# Altium PCB 800U R3N3_LED_V1.1.PcbDoc (part 2 of 2)
Units mm, origin at the board's own origin, x right, y up, seen from the top; angles counter-clockwise.
Board outline 308.48 x 220.22 mm, 4 copper layers (Top Layer, GND, Mid-Layer 2, Bottom Layer); 79 components, 48 nets, 220 pads, 97 vias.
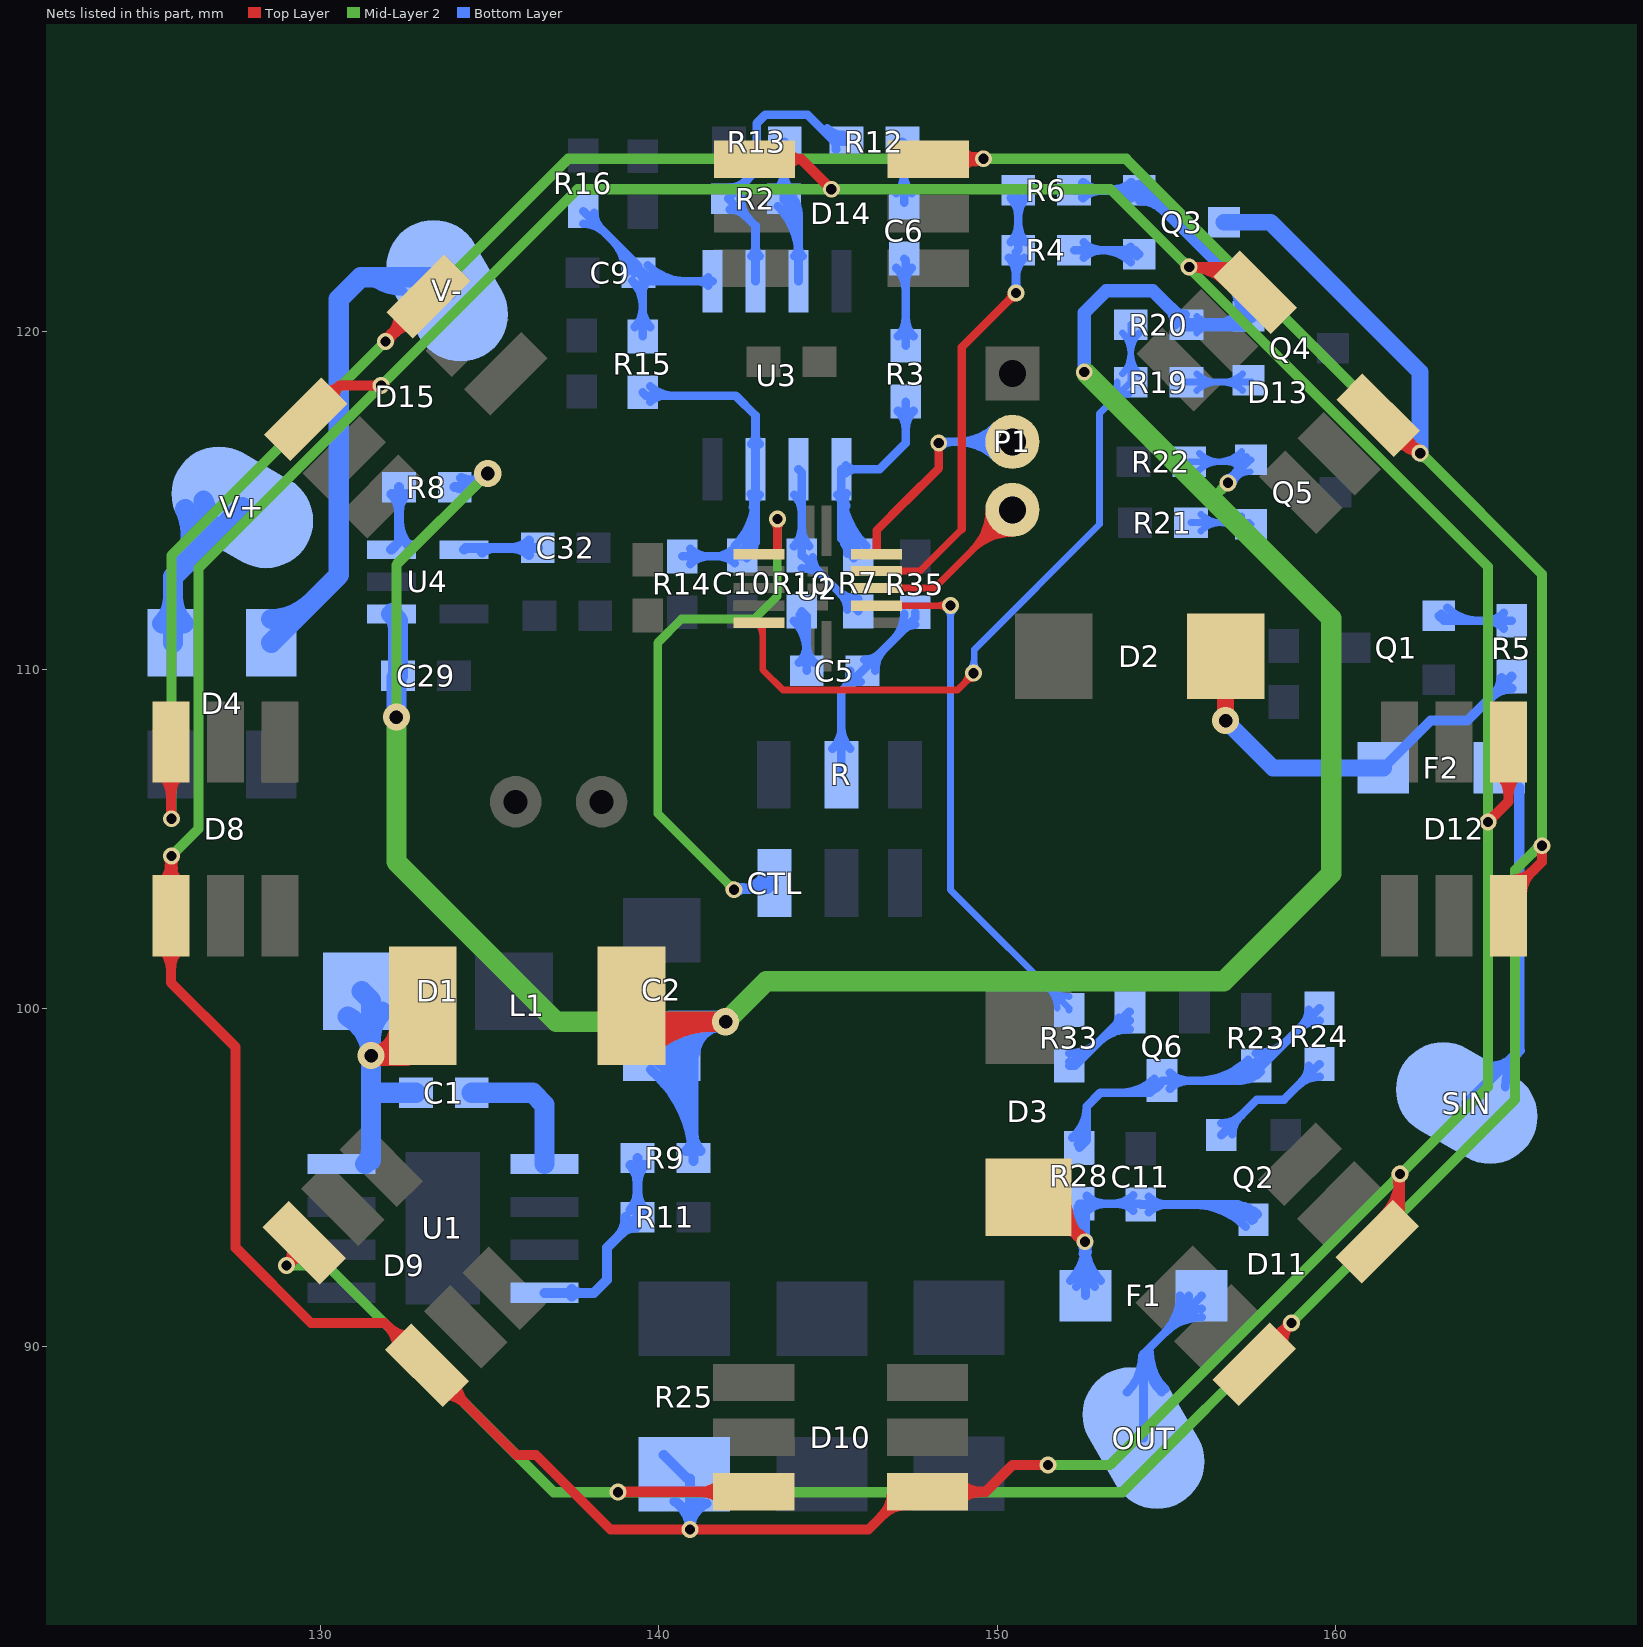
[diagram p4: the nets of this part, all layers, seen from the top]

## Via types
v1: diameter 0.5, hole 0.3, Top Layer to Bottom Layer, 88 vias
v2: diameter 0.8, hole 0.4, Top Layer to Bottom Layer, 6 vias
v3: diameter 0.6, hole 0.3, Top Layer to Bottom Layer, 3 vias

## Nets (pads, with @x,y where several pads share a name; then routed paths per layer and width w, separated by ;. In a path a pad name is that pad's centre, name@x,y a point inside that pad or via, vN(x,y) a via of type N, cw(c..) or ccw(c..) an arc to the next point about the centre after c; other vN are vias at no path point) (continued)
LED_G: R19.2 R20.2 U2.5 | length 26
  Top Layer w0.2: U2.5@142.925,111.356 cw(c142.564,110.995) 143.075,110.995 ; U2.5@142.963,111.393 143.075,111.281 143.075,110 143.675,109.4 148.825,109.4 v1@149.325,109.9 ; 149.026,109.601 ccw(c148.728,109.9) v1@149.15,109.9 ; 149.087,109.662 cw(c149.3,109.448) v1@149.3,109.75
  Bottom Layer w0.2: v1@149.194,110.006 ccw(c148.878,110.322) 149.325,110.322 ; v1@149.325,109.8 149.325,110.6 153.025,114.3 153.025,117.575 R19.2@153.95,118.5 R20.2@153.95,120.2 ; 149.325,110.202 ccw(c149.602,110.202) v1@149.406,110.006 ; 153.267,117.817 ccw(c152.584,118.5) R19.2@153.55,118.5 ; 153.388,117.938 cw(c153.9,117.426) R19.2@153.9,118.15 ; R19.2@153.703,118.747 ccw(c153.105,119.345) 153.95,119.345 ccw(c154.795,119.345) R19.2@154.197,118.747 ; R20.2@153.703,119.953 cw(c153.105,119.355) 153.95,119.355 cw(c154.795,119.355) R20.2@154.197,119.953
  other v1: 149.3,109.9
LED_R: R4.2 R6.2 U2.9 | length 18.4
  Top Layer w0.2: U2.9@146.437,112.918 147.718,112.918 148.95,114.15
  Top Layer w0.254: 148.95,114.15 148.95,119.524 v1(150.557,121.131) ; v1@150.434,121.131 cw(c150.137,121.131) 150.347,120.921 cw(c150.557,120.711) v1@150.557,121.008
  Mid-Layer 2 w0.254: v1(150.557,121.131) v1@150.557,121.182
  Bottom Layer w0.254: R4.2@150.347,122.172 cw(c149.838,121.663) 150.557,121.663 ; R4.2@150.397,122.628 ccw(c149.845,123.18) 150.625,123.18 ccw(c151.405,123.18) R4.2@150.853,122.628 ; R6.2@150.397,123.947 cw(c149.845,123.395) 150.625,123.395 cw(c151.405,123.395) R6.2@150.853,123.947 ; v1@150.47,121.218 ccw(c150.26,121.428) 150.557,121.428 ccw(c150.854,121.428) v1@150.644,121.218 ; v1(150.557,121.131) 150.557,122.332 R4.2@150.625,122.4 R6.2@150.625,124.175 ; 150.557,121.578 cw(c151.397,121.578) R4.2@150.803,122.172
LEDCTL: CTL.1 U2.1 | length 21.7
  Top Layer w0.254: U2.1@142.963,113.418 143.507,113.418 v1(143.507,114.456) ; v1@143.42,114.369 cw(c143.211,114.16) 143.507,114.16 ; 143.507,113.609 ccw(c143.751,113.609) U2.1@143.578,113.436 ; 143.507,114.157 cw(c143.805,114.157) v1@143.594,114.369
  Mid-Layer 2 w0.254: v1@142.102,103.5 ccw(c141.805,103.5) 142.015,103.71 ccw(c142.225,103.92) v1@142.225,103.623 ; v1(142.225,103.5) 139.975,105.75 139.975,110.8 140.675,111.5 142.825,111.5 143.507,112.182 v1(143.507,114.456) ; v1@143.42,114.369 cw(c143.21,114.159) 143.507,114.159 cw(c143.804,114.159) v1@143.594,114.369
  Bottom Layer w0.254: v1@142.286,103.607 ccw(c142.435,103.864) 142.512,103.577 ccw(c142.589,103.29) v1@142.332,103.438 ; v1@142.312,103.413 cw(c142.522,103.203) 142.522,103.5 cw(c142.522,103.797) v1@142.312,103.587 ; 142.757,103.5 ccw(c142.757,104.24) CTL.1@143.332,103.775 ; CTL.1@143.135,103.934 cw(c142.225,104.67) v1(142.225,103.5) 143.225,103.5 CTL.1@143.425,103.7
NetC1_1: C1.1 U1.1 | length 4
  Bottom Layer w0.6: C1.1@134.475,97.5 136.275,97.5 136.625,97.15 U1.1@136.625,95.4
NetC1_2: C1.2 D1.2 L1.1 U1.8 | length 13.4
  Top Layer w0.6: L1.1@132.147,98.6 ccw(c132.147,99.383) L1.1@132.928,99.325 ; L1.1@132.33,99.369 cw(c131.5,99.432) v2(131.5,98.6) L1.1@132.561,98.6 ; L1.1@132.498,99.537 L1.1@133.028,100.067
  Bottom Layer w0.6: D1.2@130.81,99.758 cw(c130.15,98.58) v2@131.5,98.58 ; D1.2@131.225,100.5 131.5,100.225 v2(131.5,98.6) U1.8@131.5,95.5 ; U1.8@131.325,95.4 ccw(c130.903,95.822) 131.5,95.822 ; 131.5,97.5 C1.2@132.825,97.5 ; 131.5,99.112 cw(c132.613,99.112) D1.2@131.826,99.899
NetC5_1: C5.1 R35.1 R.1 | length 10.8
  Bottom Layer w0.254: R.1@145.136,107.664 ccw(c144.5,108.3) 145.4,108.3 ccw(c146.3,108.3) R.1@145.664,107.664 ; R.1@145.4,106.9 145.4,109.35 ; 145.509,109.459 cw(c145.975,108.993) C5.1@145.975,109.652 ; C5.1@145.652,109.971 cw(c144.791,109.959) 145.4,109.35 ; C5.1@146.075,110.298 ccw(c146.075,110.957) 146.541,110.491 ; C5.1@146.398,109.975 cw(c147.298,109.975) 146.662,110.612 ; 146.935,110.885 ccw(c146.17,111.65) R35.1@147.252,111.65 ; 147.237,111.187 cw(c147.575,110.849) R35.1@147.575,111.327 ; R35.1@147.575,111.7 147.575,111.525 C5.1@146.025,109.975 145.4,109.35
NetC5_2: C5.2 R10.1 | length 4.6
  Bottom Layer w0.254: R10.1@143.997,111.447 cw(c143.083,110.533) 144.375,110.533 ; C5.2@144.147,110.203 ccw(c143.595,110.755) 144.375,110.755 ccw(c145.155,110.755) C5.2@144.603,110.203 ; R10.1@144.176,111.626 cw(c143.696,111.146) 144.375,111.146 ; R10.1@144.225,111.725 144.375,111.575 C5.2@144.375,109.975
NetC6_1: C6.1 R3.2 | length 5
  Bottom Layer w0.254: C6.1@147.022,121.872 cw(c146.35,121.2) 147.3,121.2 ; R3.2@147.072,119.853 ccw(c146.52,120.405) 147.3,120.405 ccw(c148.08,120.405) R3.2@147.528,119.853 ; C6.1@147.25,122.15 147.3,122.1 R3.2@147.3,119.575 ; 147.3,121.441 cw(c147.909,121.441) C6.1@147.478,121.872
NetC6_2: C6.2 R12.1 | length 4.3
  Bottom Layer w0.254: C6.2@147.022,124.078 ccw(c146.47,124.63) 147.25,124.63 ccw(c148.03,124.63) C6.2@147.478,124.078 ; R12.1@147.022,125.372 cw(c146.47,124.82) 147.25,124.82 cw(c148.03,124.82) R12.1@147.478,125.372 ; R12.1@147.2,125.6 147.25,125.55 C6.2@147.25,123.8
NetC9_1: C9.1 R15.2 R16.2 U3.5 | length 14.6
  Bottom Layer w0.254: R16.2@137.775,123.177 cw(c137.775,122.276) 138.412,122.913 ; R16.2@137.775,123.55 139.4,121.925 C9.1@139.4,121.725 C9.1@139.525,121.6 ; R16.2@138.098,123.5 ccw(c138.757,123.5) 138.291,123.034 ; 138.622,122.703 cw(c137.644,121.725) C9.1@139.027,121.725 ; 139.055,122.27 cw(c138.511,121.725) C9.1@139.281,121.725 ; C9.1@139.222,121.497 cw(c138.489,120.764) 139.525,120.764 ; R15.2@139.297,120.128 ccw(c138.745,120.68) 139.525,120.68 ccw(c140.305,120.68) R15.2@139.753,120.128 ; C9.1@139.499,121.774 ccw(c140.22,122.495) 140.22,121.475 ; R15.2@139.525,119.85 C9.1@139.525,121.6 ; 139.525,121.126 cw(c140.049,121.126) C9.1@139.678,121.497 ; C9.1@139.678,121.953 ccw(c140.833,123.108) 140.833,121.475 ; U3.5@141.468,121.353 ccw(c141.172,121.057) 141.172,121.475 ccw(c141.172,121.893) U3.5@141.468,121.597 ; U3.5@141.59,121.475 139.65,121.475 C9.1@139.525,121.6
NetC10_1: C10.1 R14.2 R15.1 U3.3 | length 18.8
  Bottom Layer w0.254: R15.1@139.525,118.2 139.625,118.1 142.275,118.1 142.86,117.515 U3.3@142.86,115.925 142.86,113.76 C10.1@142.475,113.375 142.45,113.35 R14.2@140.7,113.35 ; R15.1@139.753,117.922 cw(c140.184,117.491) 140.184,118.1 ; R15.1@139.753,118.378 ccw(c140.425,119.05) 140.425,118.1 ; R14.2@140.928,113.122 cw(c141.48,112.57) 141.48,113.35 cw(c141.48,114.13) R14.2@140.928,113.578 ; 141.635,113.35 ccw(c141.635,114.215) C10.1@142.247,113.603 ; 141.756,113.35 cw(c141.756,112.656) C10.1@142.247,113.147 ; C10.1@142.247,113.653 ccw(c140.766,115.134) U3.3@142.86,115.134 ; C10.1@142.426,113.474 ccw(c141.379,114.521) 142.86,114.521 ; C10.1@142.606,113.294 ccw(c141.992,113.908) 142.86,113.908 ; U3.3@142.714,115.207 cw(c142.261,114.916) 142.787,114.801 ; U3.3@142.738,115.178 cw(c142.442,114.882) 142.86,114.882 cw(c143.278,114.882) U3.3@142.982,115.178 ; U3.3@142.738,116.672 ccw(c142.442,116.968) 142.86,116.968 ccw(c143.278,116.968) U3.3@142.982,116.672 ; 142.824,114.968 cw(c143.113,114.905) U3.3@142.953,115.154
NetC11_1: C11.1 D3.2 F1.2 Q2.3 R28.2 | length 32.7
  Top Layer w0.254: D3.2@150.925,94.42 151.28,94.42 v1(152.6,93.1) ; D3.2@151.186,93.93 cw(c151.402,93.139) D3.2@151.981,93.719 ; D3.2@151.253,93.685 cw(c151.534,92.653) 152.291,93.409 ; D3.2@151.32,93.44 cw(c151.667,92.167) v1(152.6,93.1) ; D3.2@151.814,94.411 ccw(c153.043,94.395) D3.2@152.174,93.526 ; D3.2@152.068,94.407 ccw(c153.885,94.385) v1(152.6,93.1) ; v1@152.477,93.1 ccw(c152.18,93.1) 152.39,93.31 ccw(c152.6,93.52) v1@152.6,93.223 ; v1@152.481,93.068 ccw(c152.194,92.991) 152.343,93.249 ccw(c152.491,93.506) v1@152.568,93.219 ; v1@152.481,93.132 ccw(c152.194,93.209) 152.452,93.357 ccw(c152.709,93.506) v1@152.632,93.219
  Bottom Layer w0.254: F1.2@152.161,91.949 ccw(c151.077,93.033) 152.61,93.033 ccw(c154.144,93.033) F1.2@153.06,91.949 ; R28.2@152.197,93.947 cw(c151.197,92.947) v1@152.61,92.947 ; F1.2@152.341,91.769 ccw(c151.691,92.42) 152.61,92.42 ccw(c153.53,92.42) F1.2@152.88,91.769 ; R28.2@152.376,94.126 cw(c151.811,93.561) 152.61,93.561 ; 152.476,93.448 ccw(c152.86,93.55) v1@152.661,93.207 ; v1@152.493,93.039 cw(c152.155,92.843) 152.533,92.742 ; v1@152.513,93.013 cw(c152.278,92.778) 152.61,92.778 ; v1@152.513,93.187 ccw(c152.278,93.422) 152.61,93.422 ; v1@152.538,92.993 cw(c152.402,92.758) 152.665,92.828 ; F1.2@152.61,91.5 152.61,94.04 R28.2@152.425,94.225 154.225,94.225 C11.1@154.25,94.2 157.125,94.2 Q2.3@157.575,93.75 ; 152.61,92.828 cw(c152.872,92.828) v1@152.687,93.013 ; 152.61,93.372 ccw(c152.872,93.372) v1@152.687,93.187 ; R28.2@152.653,93.997 cw(c153.205,93.445) 153.205,94.225 cw(c153.205,95.005) R28.2@152.653,94.453 ; 152.674,92.795 cw(c152.985,92.878) v1@152.707,93.038 ; 153.41,94.225 ccw(c153.41,95.09) C11.1@154.022,94.478 ; 153.531,94.225 cw(c153.531,93.531) C11.1@154.022,94.022 ; C11.1@154.478,93.972 cw(c155.03,93.42) 155.03,94.2 cw(c155.03,94.98) C11.1@154.478,94.428 ; 155.769,94.2 cw(c155.769,91.969) Q2.3@157.347,93.547 ; 156.382,94.2 cw(c156.382,92.582) Q2.3@157.526,93.726 ; 156.996,94.2 cw(c156.996,93.196) Q2.3@157.706,93.906
NetC32_1: C32.1 U4.4 | length 3.7
  Bottom Layer w0.3: U4.4@134.25,113.55 134.3,113.6 C32.1@136.425,113.6 ; U4.4@134.788,113.462 cw(c135.122,113.128) 135.122,113.6 ; C32.1@136.163,113.388 ccw(c135.651,112.876) 135.651,113.6 ccw(c135.651,114.324) C32.1@136.163,113.812
NetD2_2: D2.2 F2.1 R5.1 | length 13.2
  Top Layer w0.3: D2.2@156.75,110.395 D2.2@156.755,110.4
  Top Layer w0.5: v2(156.75,108.5) D2.2@156.75,110.395
  Bottom Layer w0.3: F2.1@161.411,107.1 162.811,108.5 163.9,108.5 R5.1@165.2,109.8 ; 164.603,109.203 cw(c165.2,108.605) R5.1@165.2,109.45 ; 164.723,109.323 ccw(c164.296,109.75) R5.1@164.9,109.75
  Bottom Layer w0.5: v2(156.75,108.5) 158.15,107.1 F2.1@161.411,107.1
NetD4_2: D4.2 V-.1 | length 17.2
  Bottom Layer w0.254: 131.303,121.653 ccw(c132.458,122.808) V-.1@132.458,121.175
  Bottom Layer w0.6: D4.2@128.55,110.8 130.55,112.8 130.55,120.95 131.2,121.6 133.35,121.6 V-.1@133.75,121.2 ; D4.2@128.55,111.5 ccw(c128.55,113.19) 129.745,111.995
NetD4_3: D4.3 V+.1 | length 10.5
  Bottom Layer w0.6: D4.3@125.332,111.368 ccw(c124.564,112.136) 125.65,112.136 ccw(c126.736,112.136) D4.3@125.968,111.368 ; D4.3@125.65,110.8 125.65,112.75 ; V+.1@126.007,114.741 cw(c124.398,114.002) 125.65,112.75 ; 126.26,113.36 ccw(c125.234,114.386) V+.1@126.553,114.991 ; V+.1@127.7,114.8 125.65,112.75
NetF1_1: F1.1 OUT.1 | length 12.4
  Bottom Layer w0.254: OUT.1@153.836,88.649 ccw(c152.752,89.733) 154.286,89.733 ; OUT.1@154.325,87.3 154.325,89.785 F1.1@156.039,91.5 ; 154.41,89.733 ccw(c155.944,89.733) OUT.1@154.86,88.649 ; 154.51,89.833 ccw(c156.044,89.833) OUT.1@154.96,88.749 ; F1.1@155.404,91.5 cw(c153.871,91.5) 154.955,90.416 cw(c156.039,89.332) F1.1@156.039,90.865 ; F1.1@155.658,91.5 cw(c154.739,91.5) 155.389,90.85 cw(c156.039,90.199) F1.1@156.039,91.119
NetF2_2: F2.2 SIN.1 | length 12.7
  Bottom Layer w0.254: SIN.1@164.6,98.3 ccw(c164.6,99.19) 165.229,98.561 ; SIN.1@165.014,97.667 cw(c166.548,97.667) 165.464,98.751
  Bottom Layer w0.3: SIN.1@163.875,97.2 165.425,98.75 165.425,106.515 F2.2@164.84,107.1
NetP1_2: P1.2 U2.10 | length 10.7
  Top Layer w0.254: U2.10@146.437,113.418 146.437,114.12 147.295,114.977 147.302,114.977 148.275,115.95 v1(148.275,116.7)
  Bottom Layer w0.254: v1(148.275,116.7) 148.31,116.735 P1.2@150.45,116.735 ; v1@148.362,116.613 cw(c148.656,116.319) 148.656,116.735 ; P1.2@149.974,116.259 ccw(c148.825,115.11) 148.825,116.735 ccw(c148.825,118.36) P1.2@149.974,117.211 ; P1.2@150.154,116.439 ccw(c149.438,115.723) 149.438,116.735 ccw(c149.438,117.747) P1.2@150.154,117.031
NetP1_3: P1.3 U2.8 | length 9.5
  Top Layer w0.2: U2.8@146.437,112.418 148.143,112.418 P1.3@150.45,114.725 ; P1.3@149.75,114.725 cw(c148.06,114.725) 149.255,113.53 cw(c150.45,112.335) P1.3@150.45,114.025 ; P1.3@149.95,114.725 cw(c148.743,114.725) 149.596,113.871 cw(c150.45,113.018) P1.3@150.45,114.225
NetQ1_1: Q1.1 R5.2 | length 5
  Bottom Layer w0.254: Q1.1@163.05,111.6 163.2,111.45 R5.2@165.2,111.45 ; Q1.1@163.124,111.649 ccw(c163.604,112.129) 163.604,111.45 ; Q1.1@163.303,111.828 ccw(c164.217,112.742) 164.217,111.45 ; R5.2@164.972,111.222 ccw(c164.42,110.67) 164.42,111.45 ccw(c164.42,112.23) R5.2@164.972,111.678
NetQ2_1: Q2.1 R24.2 | length 6.2
  Bottom Layer w0.254: Q2.1@156.625,96.25 157.675,97.3 158.475,97.3 R24.2@159.525,98.35 ; Q2.1@156.625,96.598 ccw(c156.625,97.438) 157.219,96.844 ; Q2.1@156.948,96.275 cw(c157.667,96.275) 157.159,96.784 ; 158.888,97.713 cw(c159.525,97.077) R24.2@159.525,97.977 ; 159.009,97.834 ccw(c158.543,98.3) R24.2@159.202,98.3
NetQ3_1: Q3.1 R4.1 | length 4.9
  Bottom Layer w0.254: R4.1@152.275,122.4 154.075,122.4 Q3.1@154.2,122.275 ; R4.1@152.553,122.172 cw(c153.105,121.62) 153.105,122.4 cw(c153.105,123.18) R4.1@152.553,122.628 ; 153.093,122.4 cw(c153.093,121.193) Q3.1@153.947,122.047 ; 153.697,122.4 ccw(c153.697,122.753) Q3.1@153.947,122.503 ; 153.707,122.4 cw(c153.707,121.807) Q3.1@154.126,122.226
NetQ4_1: Q4.1 R19.1 | length 4.6
  Bottom Layer w0.2: R19.1@155.6,118.5 Q4.1@157.525,118.5 ; R19.1@155.897,118.253 cw(c156.495,117.655) 156.495,118.5 cw(c156.495,119.345) R19.1@155.897,118.747 ; Q4.1@157.253,118.253 ccw(c156.655,117.655) 156.655,118.5 ccw(c156.655,119.345) Q4.1@157.253,118.747
NetQ5_1: Q5.1 R21.1 | length 4.9
  Bottom Layer w0.2: R21.1@155.725,114.35 157.45,114.35 Q5.1@157.5,114.3 ; R21.1@156.022,114.103 cw(c156.62,113.505) 156.62,114.35 cw(c156.62,115.195) R21.1@156.022,114.597 ; 156.509,114.35 cw(c156.509,113.334) Q5.1@157.228,114.053 ; 156.751,114.35 ccw(c156.751,115.024) Q5.1@157.228,114.547 ; 156.992,114.35 cw(c156.992,113.817) Q5.1@157.369,114.194
NetQ6_1: Q6.1 R33.1 | length 5.8
  Bottom Layer w0.254: R33.1@152.125,98.3 152.3,98.3 153.891,99.891 Q6.1@153.922,99.891 ; R33.1@152.125,98.419 ccw(c152.125,99.129) 152.627,98.627 ; R33.1@152.125,98.673 ccw(c152.125,99.996) 153.06,99.06 ; 153.001,99.001 cw(c153.922,98.079) Q6.1@153.922,99.383 ; 153.434,99.434 cw(c153.922,98.946) Q6.1@153.922,99.637 ; Q6.1@153.507,99.507 ccw(c153.301,99.713) Q6.1@153.592,99.713
NetQ6_3: Q6.3 R23.1 R24.1 R28.1 | length 20.5
  Bottom Layer w0.254: R28.1@152.217,96.172 ccw(c151.439,97.1) 152.65,97.1 ; R28.1@152.381,95.978 ccw(c151.896,96.555) 152.65,96.555 ; R28.1@152.425,95.875 152.65,96.1 152.65,97.1 ; 153.641,97.5 ccw(c153.641,98.914) Q6.3@154.642,97.914 ; 154.255,97.5 ccw(c154.255,98.301) Q6.3@154.821,97.735 ; Q6.3@155.108,97.625 cw(c155.672,97.061) 155.672,97.859 cw(c155.672,98.656) Q6.3@155.108,98.092 ; 155.925,97.859 ccw(c155.925,99.975) R23.1@157.422,98.478 ; 156.539,97.859 ccw(c156.539,99.361) R23.1@157.601,98.299 ; 157.152,97.859 ccw(c157.152,98.748) R23.1@157.781,98.119 ; R23.1@157.65,98.419 ccw(c157.65,99.129) 158.152,98.627 ; R23.1@157.65,98.673 ccw(c157.65,99.996) 158.585,99.06 ; 158.888,99.363 cw(c159.525,98.727) R24.1@159.525,99.627 ; 159.009,99.484 ccw(c158.543,99.95) R24.1@159.202,99.95 ; R24.1@159.525,100 157.825,98.3 R23.1@157.65,98.3 157.209,97.859 Q6.3@154.875,97.859 154.516,97.5 153.05,97.5 152.65,97.1
NetR2_1: R2.1 R12.2 U3.6 | length 12.8
  Bottom Layer w0.254: R2.1@142.1,123.602 cw(c142.1,122.943) 142.566,123.409 ; R2.1@142.1,124.248 ccw(c142.1,124.907) 142.566,124.441 ; 142.687,123.288 cw(c143.323,123.925) 142.423,123.925 cw(c143.323,123.925) 142.687,124.562 ; U3.6@142.738,122.222 ccw(c142.442,122.518) 142.86,122.518 ccw(c143.278,122.518) U3.6@142.982,122.222 ; U3.6@142.86,121.475 142.86,123.115 R2.1@142.05,123.925 142.9,124.775 142.9,126.15 143.15,126.4 144.4,126.4 145.2,125.6 R12.2@145.55,125.6 ; R12.2@145.239,125.363 ccw(c144.338,125.363) 144.975,126 ccw(c145.441,126.466) R12.2@145.441,125.807
NetR2_2: R2.2 R13.1 U3.7 | length 10.9
  Bottom Layer w0.254: R13.1@143.447,125.372 cw(c142.835,124.76) 143.7,124.76 ; R2.2@143.472,124.153 ccw(c142.92,124.705) 143.7,124.705 ccw(c144.48,124.705) R2.2@143.928,124.153 ; R2.2@143.522,123.697 cw(c142.053,122.228) U3.7@144.13,122.228 ; 143.7,124.881 cw(c144.394,124.881) R13.1@143.903,125.372 ; R2.2@143.701,123.876 cw(c142.666,122.841) 144.13,122.841 ; R13.1@143.725,125.6 143.7,125.575 R2.2@143.7,123.925 144.13,123.495 U3.7@144.13,121.475 ; R2.2@143.881,124.056 cw(c143.279,123.454) 144.13,123.454 ; U3.7@144.008,122.222 ccw(c143.712,122.518) 144.13,122.518 ccw(c144.548,122.518) U3.7@144.252,122.222
NetR3_1: R3.1 R7.2 U3.1 | length 14.8
  Bottom Layer w0.254: U3.1@145.278,115.178 cw(c144.982,114.882) 145.4,114.882 cw(c145.818,114.882) U3.1@145.522,115.178 ; U3.1@145.31,115.152 cw(c145.046,114.718) 145.539,114.838 ; 145.4,114.185 ccw(c146.66,114.185) R7.2@145.769,113.294 ; 145.4,114.799 ccw(c147.274,114.799) R7.2@145.949,113.474 ; U3.1@145.4,115.412 ccw(c147.887,115.412) R7.2@146.128,113.653 ; 145.509,114.962 cw(c145.827,115.04) U3.1@145.548,115.21 ; U3.1@145.522,115.803 cw(c145.818,115.507) 145.818,115.925 cw(c145.818,116.343) U3.1@145.522,116.047 ; R7.2@145.577,113.433 ccw(c144.972,113.447) 145.4,113.875 ; R7.2@145.837,113.742 cw(c145.743,114.218) 145.4,113.875 ; R7.2@145.9,113.375 145.4,113.875 ; R3.1@147.072,117.647 cw(c146.52,117.095) 147.3,117.095 cw(c148.08,117.095) R3.1@147.528,117.647 ; R3.1@147.3,117.925 147.3,116.7 146.525,115.925 U3.1@145.4,115.925 145.4,113.875
NetR7_1: R7.1 R10.2 U3.2 | length 9.2
  Bottom Layer w0.254: R10.2@143.997,113.653 ccw(c143.445,114.205) 144.225,114.205 ccw(c145.005,114.205) R10.2@144.453,113.653 ; U3.2@144.008,115.178 cw(c143.483,114.653) 144.225,114.653 ; U3.2@144.13,115.925 144.225,115.83 R10.2@144.225,113.375 144.25,113.375 R7.1@145.9,111.725 ; R10.2@144.225,113.002 cw(c144.225,112.041) 144.904,112.721 ; R10.2@144.548,113.325 ccw(c145.147,113.325) 144.723,112.902 ; 145.263,112.362 ccw(c145.9,112.998) R7.1@145.9,112.098 ; 145.384,112.241 cw(c144.918,111.775) R7.1@145.577,111.775
NetR8_2: R8.2 U4.3 | length 3.9
  Bottom Layer w0.3: U4.3@132.1,113.55 132.325,113.775 R8.2@132.325,115.4 ; R8.2@132.113,115.188 cw(c131.601,114.676) 132.325,114.676 cw(c133.049,114.676) R8.2@132.537,115.188 ; 132.325,114.395 ccw(c133.395,114.395) U4.3@132.638,113.638
NetR9_1: R9.1 R11.2 U1.4 | length 10
  Bottom Layer w0.3: U1.4@136.625,91.59 138.09,91.59 138.475,91.975 138.475,92.925 R11.2@139.375,93.825 R9.1@139.375,95.575 ; U1.4@137.431,91.484 cw(c137.687,91.228) 137.687,91.59 cw(c137.687,91.952) U1.4@137.431,91.696 ; 138.778,93.228 ccw(c138.18,93.825) R11.2@139.025,93.825 ; 138.898,93.348 cw(c139.325,92.921) R11.2@139.325,93.525 ; R11.2@139.163,94.037 ccw(c138.651,94.549) 139.375,94.549 ccw(c140.099,94.549) R11.2@139.587,94.037 ; R9.1@139.163,95.363 cw(c138.651,94.851) 139.375,94.851 cw(c140.099,94.851) R9.1@139.587,95.363
OUTPUT: R33.2 U2.7 | length 18.1
  Top Layer w0.2: U2.7@146.437,111.893 v1@148.625,111.893 ; 148.247,111.893 ccw(c148.247,112.278) v1@148.519,112.006 ; 148.279,111.893 cw(c148.279,111.554) v1@148.519,111.794
  Bottom Layer w0.2: v1@148.519,111.794 cw(c148.263,111.538) 148.625,111.538 cw(c148.987,111.538) v1@148.731,111.794 ; v1(148.625,111.9) 148.625,103.5 152.125,100 R33.2@152.125,99.95 ; R33.2@151.775,100 ccw(c150.93,100) 151.528,100.597 ccw(c152.125,101.195) R33.2@152.125,100.35
R-: D8.1 D9.1 D10.1 D11.1 D12.1 D13.1 D14.1 D15.1 R25.2 | length 165.7
  Top Layer w0.3: D8.1@125.304,101.802 cw(c124.621,101.119) 125.587,101.119 cw(c126.553,101.119) D8.1@125.87,101.802 ; D8.1@125.304,103.667 ccw(c124.621,104.35) 125.587,104.35 ccw(c126.553,104.35) D8.1@125.87,103.667 ; v1@125.513,104.45 cw(c125.227,104.284) 125.546,104.199 ; 125.587,104.227 cw(c125.873,104.227) v1@125.671,104.429 ; v1(125.6,104.5) 125.587,104.487 D8.1@125.587,102.735 125.587,100.763 127.5,98.85 127.5,92.925 129.725,90.7 131.9,90.7 D9.1@133.155,89.445 135.8,86.8 136.375,86.8 138.575,84.6 146.2,84.6 D10.1@147.4,85.8 ; 125.645,104.134 cw(c126.047,104.242) v1@125.687,104.45 ; D15.1@129.57,117.401 130.569,118.4 ; D15.1@130.102,118.255 ccw(c130.197,118.772) 130.569,118.4 ; D15.1@130.424,117.933 cw(c130.941,118.028) 130.569,118.4 ; v1(131.8,118.4) 130.569,118.4 ; D9.1@132.295,89.905 ccw(c131.329,89.905) 132.012,90.588 ccw(c132.695,91.271) D9.1@132.695,90.305 ; D9.1@133.614,88.586 cw(c133.614,87.62) 134.297,88.303 cw(c134.98,88.986) D9.1@134.014,88.986 ; D14.1@142.835,125.088 144.212,125.088 ; D14.1@143.822,124.874 cw(c144.212,124.626) 144.212,125.088 ; D14.1@143.822,125.302 ccw(c144.212,125.549) 144.212,125.088 ; v1(145.1,124.2) 144.212,125.088 ; 146.592,84.992 ccw(c145.872,85.712) D10.1@146.89,85.712 ; 146.645,85.045 cw(c147.29,84.399) D10.1@147.29,85.312 ; D10.1@147.94,85.712 149.662,85.712 150.45,86.5 v1(151.5,86.5) ; D10.1@148.873,85.429 cw(c149.556,84.746) 149.556,85.712 cw(c149.556,86.678) D10.1@148.873,85.995 ; 156.328,121.9 cw(c156.328,120.894) D13.1@157.091,121.549 ; D13.1@156.863,121.354 ccw(c155.675,120.335) v1(155.675,121.9) 156.75,121.9 157.495,121.155 D13.1@157.626,121.155 ; D11.1@161.23,93.105 161.9,93.775 v1(161.9,95.1) ; D11.1@161.406,93.847 ccw(c160.214,95.039) v1@161.9,95.039 ; D11.1@161.618,93.635 ccw(c160.939,94.315) 161.9,94.315 ; v1@161.813,95.05 cw(c161.558,94.902) 161.843,94.826 ; v1(164.5,105.5) 165.113,106.113 D12.1@165.113,107.865 ; D12.1@164.83,106.933 cw(c164.147,106.25) 165.113,106.25 cw(c166.079,106.25) D12.1@165.396,106.933
  Mid-Layer 2 w0.3: v1(125.6,104.5) 126.4,105.3 126.4,113 v1(131.8,118.4) 137.6,124.2 v1(145.1,124.2) 153.35,124.2 164.5,113.05 v1(164.5,105.5) 164.5,97.675 153.325,86.5 v1(151.5,86.5) ; 155.462,122.088 ccw(c155.675,122.302) v1@155.675,122 ; v1@155.775,121.9 ccw(c156.077,121.9) 155.863,121.687 ; 161.712,94.887 ccw(c161.498,95.1) v1@161.8,95.1 ; v1@161.9,95.2 ccw(c161.9,95.502) 162.113,95.288
  Bottom Layer w0.3: R25.2@140.15,86.8 R25.2@140.85,86.1 ; R25.2@140.476,85.432 cw(c139.926,84.598) 140.925,84.598 cw(c141.778,84.598) R25.2@141.41,85.368 ; v1(140.925,84.6) R25.2@140.925,86.1 ; 140.925,85.074 cw(c141.55,85.074) R25.2@141.281,85.639
RED: D8.6 D9.6 D10.6 D11.6 D12.6 D13.6 D14.6 D15.6 Q3.3 | length 160.6
  Top Layer w0.3: D8.6@125.304,106.933 cw(c124.621,106.25) 125.587,106.25 cw(c126.553,106.25) D8.6@125.87,106.933 ; 125.587,105.873 ccw(c125.873,105.873) v1@125.671,105.671 ; D8.6@125.587,107.865 125.587,105.613 v1(125.6,105.6) ; v1@129.095,92.495 cw(c129.527,92.063) D9.6@129.527,92.674 ; v1@129.097,92.374 cw(c129.444,92.281) D9.6@129.264,92.592 ; D9.6@129.143,92.961 cw(c128.6,92.801) v1(129,92.4) 129.527,92.927 D9.6@129.527,93.074 ; v1@131.899,119.797 ccw(c131.807,120.14) 132.115,119.962 ; v1(131.925,119.7) 133.199,120.974 D15.6@133.199,121.03 ; v1@132.016,119.791 ccw(c131.238,120.57) D15.6@132.339,120.57 ; v1@132.022,119.674 cw(c132.528,119.538) 132.266,119.993 ; v1@132.024,119.69 cw(c132.363,119.656) 132.193,119.951 ; 132.152,119.927 cw(c132.739,119.339) D15.6@132.739,120.17 ; v1(138.8,85.7) 138.812,85.712 D10.6@142.81,85.712 ; v1@138.871,85.629 cw(c139.071,85.429) 139.071,85.712 ; D10.6@141.877,85.429 ccw(c141.194,84.746) 141.194,85.712 ccw(c141.194,86.678) D10.6@141.877,85.995 ; D14.6@147.965,125.088 149.588,125.088 v1(149.6,125.1) ; D14.6@148.898,124.805 cw(c149.581,124.122) 149.581,125.088 cw(c149.581,126.054) D14.6@148.898,125.371 ; 149.324,125.157 ccw(c149.401,125.445) v1@149.55,125.187 ; 149.329,125.088 ccw(c149.329,125.371) v1@149.529,125.171 ; 149.353,125.027 ccw(c149.284,125.282) v1@149.513,125.15 ; D11.6@157.601,89.477 157.601,89.601 v1(158.7,90.7) ccw(c159.302,90.098) D11.6@158.458,89.988 ; D11.6@158.061,90.336 ccw(c158.061,91) v1@158.531,90.531 ; 158.392,90.451 ccw(c158.166,90.843) v1@158.603,90.726 ; D13.6@161.255,117.526 v1@162.381,116.4 ; D13.6@161.721,116.667 cw(c161.736,115.755) v1@162.381,116.4 ; D13.6@162.114,117.06 ccw(c163.026,117.045) v1@162.381,116.4 ; 162.126,116.655 ccw(c162.5,117.029) v1@162.5,116.5 ; 162.137,116.541 ccw(c162.359,116.926) v1@162.474,116.497 ; D13.6@162.166,116.773 ccw(c162.679,117.07) v1@162.526,116.497 ; v1(162.5,116.4) v1@162.381,116.4 ; D12.6@165.113,102.735 165.113,103.338 166.1,104.325 v1(166.1,104.8) ; D12.6@165.113,103.785 ccw(c165.113,104.863) 165.875,104.1 ; D12.6@165.513,103.385 cw(c166.366,103.385) 165.763,103.988
  Mid-Layer 2 w0.3: v1(125.6,105.6) 125.6,113.375 v1(131.925,119.7) 137.325,125.1 v1(149.6,125.1) 153.825,125.1 153.825,125.075 v1(162.5,116.4) ; v1(129,92.4) 130.2,92.4 136.9,85.7 v1(138.8,85.7) 153.7,85.7 v1(158.7,90.7) 165.3,97.3 165.3,104.075 166.025,104.8 v1(166.1,104.8) 166.1,112.825 v1@162.512,116.413 ; v1@162.5,116.3 cw(c162.5,115.998) 162.713,116.212 ; 165.801,104.576 cw(c166.1,104.278) v1@166.1,104.7
  Bottom Layer w0.5: Q3.3@156.7,123.225 158.075,123.225 162.5,118.8 v1(162.5,116.4)
VDD_+5V: C2.1 C29.1 L1.2 Q3.2 Q4.2 Q5.2 R6.1 R8.1 R9.2 R20.1 R22.1 U4.1 | length 130.9
  Top Layer w0.2: v1(156.825,115.525) v1@156.825,115.6
  Top Layer w0.6: L1.2@139.196,100.067 139.663,99.6 v2(141.975,99.6) ; L1.2@139.691,98.822 cw(c141.569,96.944) 141.569,99.6 ; L1.2@139.691,99.812 ccw(c140.203,100.324) 140.203,99.6
  Mid-Layer 2 w0.3: v2(132.25,108.6) 132.25,113.1 v2(134.95,115.8) ; 156.363,115.037 156.363,115.063 v1(156.825,115.525)
  Mid-Layer 2 w0.6: v2(132.25,108.6) 132.25,104.325 136.975,99.6 v2(141.975,99.6) 143.175,100.8 156.7,100.8 159.875,103.975 159.875,111.525 156.363,115.037 v1@152.65,118.75
  Bottom Layer w0.2: R22.1@155.675,116.15 Q5.2@157.45,116.15 ; R20.1@155.897,119.953 cw(c156.495,119.355) 156.495,120.2 cw(c156.495,121.045) R20.1@155.897,120.447 ; R22.1@155.972,115.903 cw(c156.57,115.305) 156.57,116.15 cw(c156.57,116.995) R22.1@155.972,116.397 ; 156.172,120.2 ccw(c156.172,121.728) Q4.2@157.253,120.647 ; 156.509,116.15 ccw(c156.509,117.166) Q5.2@157.228,116.447 ; 156.655,120.2 ccw(c156.655,121.245) Q4.2@157.394,120.506 ; 156.751,116.15 cw(c156.751,115.476) Q5.2@157.228,115.953 ; v1@156.786,115.67 ccw(c156.681,116.062) Q5.2@157.032,115.859 ; v1(156.825,115.525) Q5.2@157.45,116.15 ; v1@156.825,115.675 ccw(c156.825,116.037) 157.081,115.781 ccw(c157.337,115.525) v1@156.975,115.525 ; v1@156.86,115.56 ccw(c156.22,116.2) Q5.2@157.125,116.2 ; v1@156.864,115.67 ccw(c156.927,115.905) 157.048,115.694 ; v1@156.92,115.62 cw(c157.475,115.065) Q5.2@157.475,115.85 ; v1@156.97,115.486 cw(c157.435,115.362) Q5.2@157.194,115.778 ; v1@156.97,115.564 cw(c157.278,115.646) 157.002,115.806 ; 156.992,116.15 ccw(c156.992,116.683) Q5.2@157.369,116.306 ; Q4.2@157.325,120.2 Q4.2@157.525,120.4 ; Q5.2@157.5,116.2 Q5.2@157.45,116.15
  Bottom Layer w0.3: R8.1@133.975,115.4 134.55,115.4 ; R8.1@134.025,115.4 ccw(c134.267,115.891) 134.654,115.504 ; R8.1@134.158,115.669 ccw(c134.462,116.288) v2(134.95,115.8) 134.55,115.4 ; R8.1@134.283,115.248 cw(c134.55,115.091) 134.55,115.4 ; R8.1@134.283,115.552 ccw(c134.55,115.709) 134.55,115.4 ; R8.1@134.354,115.331 ccw(c133.997,115.95) v2@134.703,115.839 ; C2.1@139.768,98.187 cw(c137.504,95.491) R9.2@141.025,95.491 ; C2.1@139.961,98.417 cw(c138.045,96.135) 141.025,96.135 ; C2.1@140.154,98.647 cw(c138.585,96.779) 141.025,96.779 ; C2.1@140.347,98.877 cw(c139.126,97.422) 141.025,97.422 ; C2.1@140.54,99.106 cw(c139.666,98.066) C2.1@141.025,98.066 ; R9.2@140.813,95.787 ccw(c140.301,96.299) 141.025,96.299 ccw(c141.749,96.299) R9.2@141.237,95.787 ; R9.2@141.025,95.575 C2.1@141.025,98.921 ; R6.1@152.275,124.175 Q3.2@154.2,124.175 154.319,124.175 157.525,120.969 ; R6.1@152.537,123.963 cw(c153.049,123.451) 153.049,124.175 cw(c153.049,124.899) R6.1@152.537,124.387 ; Q3.2@153.963,123.963 ccw(c153.451,123.451) 153.451,124.175 ccw(c153.451,124.899) Q3.2@153.963,124.387 ; Q3.2@154.225,123.875 cw(c154.225,122.923) 154.898,123.596 ; Q3.2@154.525,124.175 ccw(c155.022,124.175) Q3.2@154.671,123.824 ; 155.003,120.797 cw(c154.405,120.2) R20.1@155.25,120.2 ; 155.123,120.677 ccw(c155.55,121.104) R20.1@155.55,120.5 ; 156.568,121.927 cw(c155.041,120.4) Q4.2@157.2,120.4 ; 157.08,121.414 cw(c156.065,120.4) Q4.2@157.5,120.4 ; Q4.2@157.355,120.647 ccw(c157.135,120.969) 157.525,120.969 ; Q4.2@157.525,120.4 157.525,120.969 ; 157.592,120.902 cw(c157.09,120.4) Q4.2@157.8,120.4 ; Q4.2@157.695,120.647 cw(c157.915,120.969) 157.525,120.969
  Bottom Layer w0.4: v1(152.575,118.8) 152.575,120.55 153.225,121.2 154.6,121.2 R20.1@155.6,120.2 Q4.2@157.325,120.2
  Bottom Layer w0.6: U4.1@132.1,111.65 132.3,111.45 C29.1@132.3,109.825 132.25,109.775 v2(132.25,108.6) ; U4.1@132.118,111.668 cw(c131.678,111.228) 132.3,111.228 ; C2.1@140.319,99.627 v2@141.948,99.627 ; C2.1@140.337,98.796 cw(c141.272,98.685) 141.272,99.627 ; C2.1@140.932,98.725 cw(c141.948,98.604) v2@141.948,99.627 ; v2(141.975,99.6) v2@141.948,99.627
pads on no net: U1.5
copper on no net:
  other v3: 145.35,105.3

## Polygon pours and split planes (outlines as drawn)
GND on GND "G" (solid, remove dead copper, pour order 14): 121.3,128.9 168.775,128.9 168.775,82.775 168.7,82.7 121.075,82.7 121.075,128.825 121.15,128.9
AGND on GND "G" (solid, remove dead copper, pour order 10): 136.15,126 136.15,120.325 136.125,120.3 136.325,120.1 139.175,120.1 139.475,119.8 139.675,119.6 139.675,118.2 139.675,106.65 139.625,106.6 139.725,106.5 149.025,106.5 149.025,127.725 149.1,127.8 137.95,127.8 136.15,126
GND on Top Layer "B" (solid, remove dead copper, pour order 13): 121.3,128.9 168.775,128.9 168.775,82.775 168.7,82.7 121.075,82.7 121.075,128.825 121.15,128.9
AGND on Top Layer "T" (solid, remove dead copper, pour order 9): 136.15,126 136.15,120.325 136.125,120.3 136.325,120.1 139.175,120.1 139.475,119.8 139.675,119.6 139.675,118.2 139.675,106.65 139.625,106.6 139.725,106.5 149.025,106.5 149.025,127.725 149.1,127.8 137.95,127.8 136.15,126
AGND on Mid-Layer 2 "B" (solid, remove dead copper, pour order 8): 136.15,126 136.15,120.325 136.125,120.3 136.325,120.1 139.175,120.1 139.475,119.8 139.675,119.6 139.675,118.2 139.675,106.65 139.625,106.6 139.725,106.5 149.025,106.5 149.025,127.725 149.1,127.8 137.95,127.8 136.15,126
GND on Mid-Layer 2 "M" (solid, remove dead copper, pour order 12): 121.3,128.9 168.775,128.9 168.775,82.775 168.7,82.7 121.075,82.7 121.075,128.825 121.15,128.9
GND on Bottom Layer "B" (solid, remove dead copper, pour order 11): 121.3,128.9 168.775,128.9 168.775,82.775 168.7,82.7 121.075,82.7 121.075,128.825 121.15,128.9

## Keep-outs
Keep-Out Layer:
  circle w0.15: c153.8,105.3 r3
  circle w0.15: c145.4,96.7 r3
  lines w0.2: 122.647,103.829 ccw(c145.399,105.308) 122.85,101.934 ccw(c123.344,102.008) 123.344,101.508 123.932,101.508 ccw(c145.399,105.308) 124.499,99.108 124.129,99.108 ccw(c124.129,98.608) 123.652,98.458 ccw(c145.399,105.308) 143.919,82.556 cw(c145.399,82.308) 146.878,82.556 ccw(c145.399,105.308) 167.145,98.458 ccw(c166.668,98.608) 166.668,99.108 166.298,99.108 ccw(c145.399,105.308) 166.865,101.508 167.453,101.508 ccw(c167.453,102.008) 167.948,101.934 ccw(c145.399,105.308) 168.151,103.829 cw(c168.399,105.308) 168.151,106.787 ccw(c145.399,105.308) 146.878,128.06 cw(c145.399,128.308) 143.919,128.06 ccw(c145.399,105.308) 122.647,106.787 cw(c122.399,105.308) 122.647,103.829

## Other copper
Top Layer:
  pour cut-out: 140.6,123.375 141.625,123.375 141.65,123.4 141.65,122.6 140.7,122.6
  pour cut-out: 142.825,105.9 147.9,105.9 147.9,104.7 142.825,104.7
GND:
  pour cut-out: 142.825,105.9 147.9,105.9 147.9,104.7 142.825,104.7
Mid-Layer 2:
  pour cut-out: 134.525,87.7 134.525,89.025 136.975,89.025 137.025,89.075 137.025,87.725
  pour cut-out: 139.475,127.9 140.8,127.9 140.8,125.45 140.85,125.4 139.5,125.4
  pour cut-out: 152.95,120.9 156.5,120.9 156.5,119.025 156.525,119 153.025,119 152.925,119.1
  pour cut-out: 158.875,105.5 162.425,105.5 162.425,103.625 162.45,103.6 158.95,103.6 158.85,103.7
  pour cut-out: 161.8,93.6 165.35,93.6 165.35,91.725 165.375,91.7 161.875,91.7 161.775,91.8
  pour cut-out: 142.825,105.9 147.9,105.9 147.9,104.7 142.825,104.7
Bottom Layer:
  pour cut-out: 130.9,102.8 132.575,102.8 132.675,102.7 132.675,101.525 132.65,101.5 130.95,101.5 130.85,101.6
  pour cut-out: 144.15,105.1 146.5,105.1 146.5,102.425 146.475,102.4 144.225,102.4
  pour cut-out: 149.125,106.7 150.8,106.7 150.9,106.6 150.9,105.425 150.875,105.4 149.175,105.4 149.075,105.5
  pour cut-out: 131.3,124 132.975,124 133.075,123.9 133.075,122.725 133.05,122.7 131.35,122.7 131.25,122.8
  pour cut-out: 142.825,105.9 147.9,105.9 147.9,104.7 142.825,104.7
  pour cut-out: 135.325,95.3 138.725,95.3 138.725,92.2 135.325,92.2
  pour cut-out: 128.875,93.7 131.925,93.7 131.925,92.2 128.875,92.2

## Silkscreen, mask and mechanical layers (free items; w line width, h text height)
Top Overlay:
  text "20160819" at 136.25,94.7 h1.5
  text "800U" at 137.05,93.3 h1.5
  text "R3N3_SENSOR" at 137.05,91.9 h1.5
  text "_V1.1" at 137.5,90.2 h1.5
Bottom Overlay:
  lines w0.2: 136.475,125.5 136.475,125.65 137.225,126.4 138.825,126.4 ; 138.9,126.4 138.825,126.4 ; 139.4,126 139,126.4 138.95,126.4 138.825,126.4 ; 143.331,114.279 143.331,110.806 148.731,110.806 148.731,114.456 143.507,114.456 ; 148.775,112.4 149.3,112.4 ; 154.05,113.5 154.05,108.2 157.3,108.2 157.3,113.5 156.725,113.5 ; 156.725,113.5 156.725,121.3 153,121.3 153,113.5 156.725,113.5 ; 149.35,109.925 153.525,109.925 153.525,113.1 149.35,113.1 149.35,109.925
Mechanical 1:
  circle w0.2: c145.399,83.808 r0.001
  circle w0.2: c145.399,126.808 r0.001
  circle w0.15: c153.8,105.3 r3
  circle w0.15: c145.4,96.7 r3
  lines w0.005: -0.127,0.508 -0.127,210.508 296.873,210.508 296.873,0.508 -0.127,0.508
  lines w0.2: 122.647,103.829 ccw(c145.399,105.308) 122.85,101.934 ccw(c123.344,102.008) 123.344,101.508 123.932,101.508 ccw(c145.399,105.308) 124.499,99.108 124.129,99.108 ccw(c124.129,98.608) 123.652,98.458 ccw(c145.399,105.308) 143.919,82.556 cw(c145.399,82.308) 146.878,82.556 ccw(c145.399,105.308) 167.145,98.458 ccw(c166.668,98.608) 166.668,99.108 166.298,99.108 ccw(c145.399,105.308) 166.865,101.508 167.453,101.508 ccw(c167.453,102.008) 167.948,101.934 ccw(c145.399,105.308) 168.151,103.829 cw(c168.399,105.308) 168.151,106.787 ccw(c145.399,105.308) 146.878,128.06 cw(c145.399,128.308) 143.919,128.06 ccw(c145.399,105.308) 122.647,106.787 cw(c122.399,105.308) 122.647,103.829 ; 142.825,104.7 147.9,104.7 147.9,105.9 142.825,105.9 142.825,104.7
Mechanical 3:
  circle w0.1: c145.399,105.308 r21.5
  circle w0.15: c212.915,114.19 r2.5
  circle w0.15: c213.025,97.09 r2.5
  circle w0.15: c204.695,105.62 r2.5
  circle w0.15: c221.365,105.58 r2.5
  lines w0.2: 121.125,105.3 172.925,105.3 ; 127.052,123.654 163.68,87.026 ; 127.426,87.345 164.054,123.973 ; 135.875,125.9 135.875,116.25 139.575,116.25 139.575,106.525 149.025,106.525 149.025,127.85 ; 145.4,79.075 145.4,129.15 ; 142.825,104.7 147.9,104.7 147.9,105.9 142.825,105.9 142.825,104.7

## Text inside footprints (layer, text, board x,y; h text height)
CT1: Top Overlay "+" at 135.759,106.569 h1.5